# Altium PCB SIXXY_00.PcbDoc
Units mm, origin at the board's own origin, x right, y up, seen from the top; angles counter-clockwise.
Board outline 18.7 x 12.4 mm, 2 copper layers (Top Layer, Bottom Layer), stack 0.571 mm thick; 29 components, 24 nets, 113 pads, 15 vias.
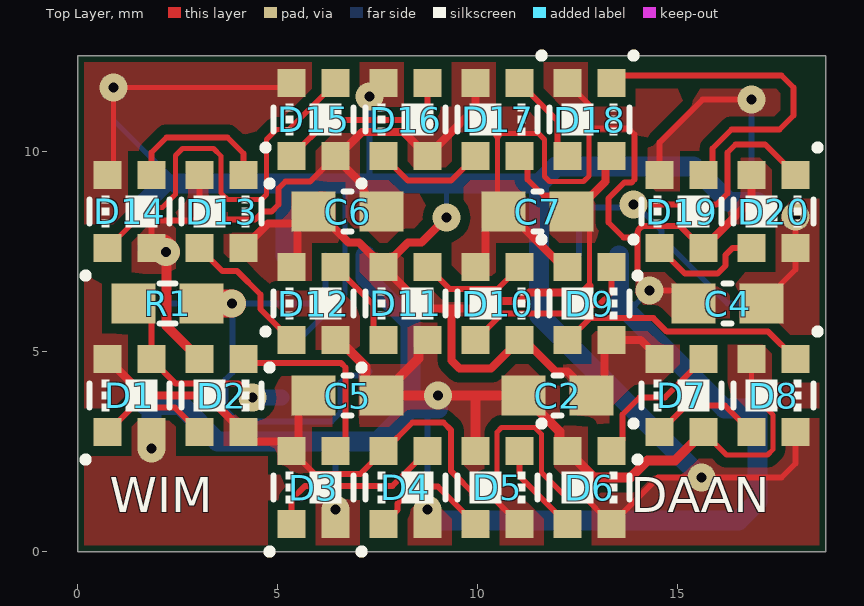
[diagram p0: Top Layer view]
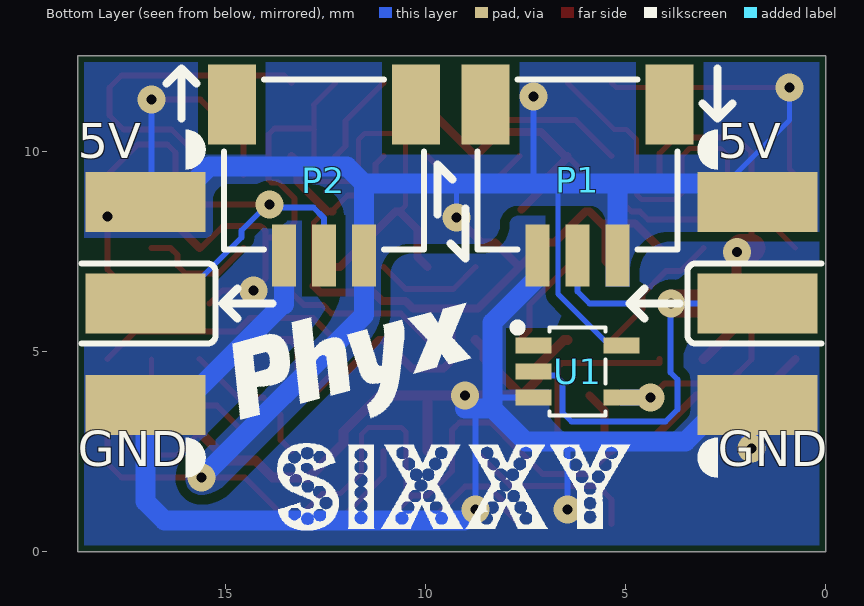
[diagram p1: Bottom Layer view, seen from below]
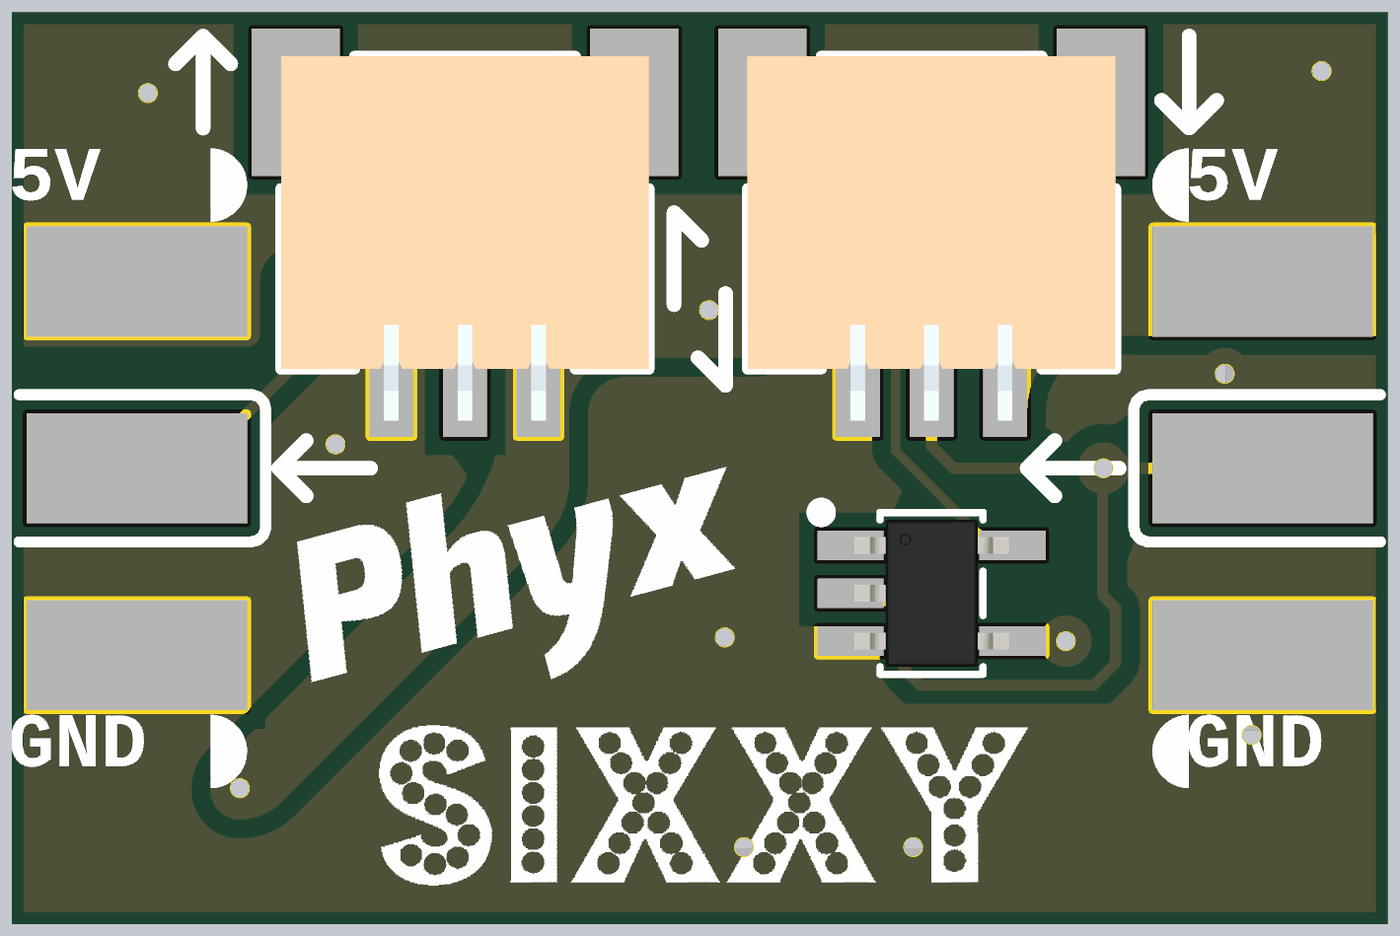
[diagram p2: 3D render of the assembled board from below, using the file's embedded part models]

## Layer stack, top to bottom
Top Solder: solder mask 0.0102, Solder Resist, Dk 3.5
Top Layer: signal copper 0.0356
Dielectric1: dielectric 0.5, FR-4, Dk 4.8
Bottom Layer: signal copper 0.0356
Bottom Solder: solder mask 0.0102, Solder Resist, Dk 3.5

## Board outline
0,0 0,12.4 18.7,12.4 18.7,0

## Design rules (kind name [scope] priority, off if disabled: settings)
BoardOutlineClearance [(OnLayer('Top Layer') OR OnLayer('Bottom Layer')) AND NOT IsText] p1: gap=0.15 ignorepadtopadclearanceinfootprint=FALSE except(0: Arc-SplitContinuation Track-SplitContinuation SMDPad-SplitContinuation THPad-SplitContinuation Via-SplitContinuation Fill-SplitContinuation Poly-SplitContinuation Region-SplitContinuation Text-SplitContinuation)
Clearance 230 [InNetClass('230VAC')] p1: gap=2 ignorepadtopadclearanceinfootprint=FALSE except(0: Arc-Hole Track-Hole SMDPad-Hole THPad-Hole Via-Hole Fill-Hole Poly-Hole Region-Hole Text-Hole)
Clearance [NOT (OnLayer('Placebound Top') OR OnLayer('Placebound Bottom'))] p2: gap=0.127 ignorepadtopadclearanceinfootprint=FALSE except(0: Arc-Hole Track-Hole SMDPad-Hole THPad-Hole Via-Hole Fill-Hole Poly-Hole Region-Hole Text-Hole; 0.25: Arc-Poly Track-Poly SMDPad-Poly THPad-Poly Via-Poly Fill-Poly Poly-Poly)
HoleSize [All] p1: absolutevalues=TRUE maxlimit=50 minlimit=0.025 maxpercent=80.000 minpercent=20.000
MinimumSolderMaskSliver [All] p1: minsoldermaskwidth=0.1
PolygonConnect PolygonConnect_Via [IsVia] p1: connectstyle=Direct reliefconductorwidth=0.254 reliefentries=4 polygonreliefangle="90 Angle" airgapwidth=0.254
PolygonConnect PolygonConnect_TIO [All vs OnLayer('Top Layer')] p2: connectstyle=Direct reliefconductorwidth=0.25 reliefentries=4 polygonreliefangle="90 Angle" airgapwidth=0.25
PolygonConnect [All] p3: connectstyle=Direct reliefconductorwidth=0.25 reliefentries=4 polygonreliefangle="90 Angle" airgapwidth=0.25
RoutingVias [All] p1: holewidth=0.3 width=0.7 viastyle="Through Hole" minholewidth=0.25 minwidth=0.7 maxholewidth=0.3 maxwidth=0.7
SilkToSolderMaskClearance SilkscreenOverComponentPads [IsPad] p1: minsilkscreentomaskgap=0.254 clearancetoexposedcopper=TRUE
SolderMaskExpansion SolderMaskExpansion_VIA [IsVia] p1: expansion=-0.1 useseparateexpansions=TRUE expansionbottom=-10
SolderMaskExpansion [All] p2: expansion=0.05
Width Width_230V [InNetClass('230VAC')] p1: maxlimit=5 minlimit=1 preferedwidth=2 minimp=50.000000 maximp=50.000000 favimp=50.000000
Width [All] p2: maxlimit=10 minlimit=0.127 preferedwidth=0.5 minimp=50.000000 maximp=50.000000 favimp=50.000000
27 further rules are at their usual default settings.

## Components (designator, comment, footprint, x,y, rotation, side; value= is the part's Value field where it differs from the comment)
C2 "CAP_CERAMIC" C0603_N 12,3.9 r180 top value="100nF 25V"
C4 "CAP_CERAMIC" C0603_N 16.25,6.2 r180 top value="100nF 25V"
C5 "CAP_CERAMIC" C0603_N 6.75,3.9 r0 top value="100nF 25V"
C6 "CAP_CERAMIC" C0603_N 6.75,8.5 r0 top value="100nF 25V"
C7 "CAP_CERAMIC" C0603_N 11.5,8.5 r180 top value="100nF 25V"
D1 "WS2812 based digital RGB LED 2022 package" LED_2022_WS2812B 1.3,3.9 r270 top value=WS2812B-2022
D2 "WS2812 based digital RGB LED 2022 package" LED_2022_WS2812B 3.6,3.9 r90 top value=WS2812B-2022
D3 "WS2812 based digital RGB LED 2022 package" LED_2022_WS2812B 5.9,1.6 r270 top value=WS2812B-2022
D4 "WS2812 based digital RGB LED 2022 package" LED_2022_WS2812B 8.2,1.6 r270 top value=WS2812B-2022
D5 "WS2812 based digital RGB LED 2022 package" LED_2022_WS2812B 10.5,1.6 r90 top value=WS2812B-2022
D6 "WS2812 based digital RGB LED 2022 package" LED_2022_WS2812B 12.8,1.6 r90 top value=WS2812B-2022
D7 "WS2812 based digital RGB LED 2022 package" LED_2022_WS2812B 15.1,3.9 r270 top value=WS2812B-2022
D8 "WS2812 based digital RGB LED 2022 package" LED_2022_WS2812B 17.4,3.9 r90 top value=WS2812B-2022
D9 "WS2812 based digital RGB LED 2022 package" LED_2022_WS2812B 12.8,6.2 r90 top value=WS2812B-2022
D10 "WS2812 based digital RGB LED 2022 package" LED_2022_WS2812B 10.5,6.2 r90 top value=WS2812B-2022
D11 "WS2812 based digital RGB LED 2022 package" LED_2022_WS2812B 8.2,6.2 r270 top value=WS2812B-2022
D12 "WS2812 based digital RGB LED 2022 package" LED_2022_WS2812B 5.9,6.2 r270 top value=WS2812B-2022
D13 "WS2812 based digital RGB LED 2022 package" LED_2022_WS2812B 3.6,8.5 r90 top value=WS2812B-2022
D14 "WS2812 based digital RGB LED 2022 package" LED_2022_WS2812B 1.3,8.5 r270 top value=WS2812B-2022
D15 "WS2812 based digital RGB LED 2022 package" LED_2022_WS2812B 5.9,10.8 r270 top value=WS2812B-2022
D16 "WS2812 based digital RGB LED 2022 package" LED_2022_WS2812B 8.2,10.8 r270 top value=WS2812B-2022
D17 "WS2812 based digital RGB LED 2022 package" LED_2022_WS2812B 10.5,10.8 r90 top value=WS2812B-2022
D18 "WS2812 based digital RGB LED 2022 package" LED_2022_WS2812B 12.8,10.8 r90 top value=WS2812B-2022
D19 "WS2812 based digital RGB LED 2022 package" LED_2022_WS2812B 15.1,8.5 r270 top value=WS2812B-2022
D20 "WS2812 based digital RGB LED 2022 package" LED_2022_WS2812B 17.4,8.5 r90 top value=WS2812B-2022
P1 "Header 1.0mm RA Shrouded 3" WE_665103131822 5.2,7.4 r0 bottom value=665103131822
P2 "Header 1.0mm RA Shrouded 3" WE_665103131822 11.541,7.4 r0 bottom value=665103131822
R1 "RESISTOR" R0603_N 2.25,6.2 r0 top value=0R
U1 "SN74LVC1G17DCKR  Buffer, Schmitt Trigger, 1.65V to 5.5V" TI_DCK_R-PDSO-G5 6.2,4.5 r270 bottom value=SN74LVC1G17DCKR

## Footprints (in the part's own frame and the unit in brackets; to place one, negate y for a bottom-side part, rotate by r counter-clockwise, add the part's x,y. Pads: shape width x height; smd on the part's side, far side on the other; paste and mask are expansions set on the pad)
C0603_N [mm] "Low density"
  rect 1.1x1 smd: 1(-0.85,0) 2(0.85,0)
  silkscreen extent -0.1,-0.5 0.1,0.5, body extent -0.8,-0.4 0.8,0.4, height 0.3
LED_2022_WS2812B [mm] "2022 WS2812B based RGB LED"
  rect 0.7x0.7 smd: 1(0.915,-0.55) 2(0.915,0.55) 3(-0.915,0.55) 4(-0.915,-0.55)
  silkscreen extent -0.4,-1.12 1.62,1, body extent -1.1,-1 1.1,1, height 0.84
R0603_N [mm] "Low density"
  rect 1.1x1 smd: 1(-0.85,0) 2(0.85,0)
  silkscreen extent -0.2,-0.5 0.2,0.5, body extent -0.8,-0.41 0.8,0.41, height 0.45
TI_DCK_R-PDSO-G5 [mm] "TI-DCK-R-PDSO-G5"
  rect 0.4x0.9 smd: 1(-0.65,-1.1) 2(0,-1.1) 3(0.65,-1.1) 4(0.65,1.1) 5(-0.65,1.1)
  silkscreen extent -1.2,-1.6 1.1,0.7, body extent -1,-1.05 1,1.05, height 0.95
WE_665103131822 [mm]
  rect 0.6x1.55 smd: 1(0,0) 2(1,0) 3(2,0)
  rect 1.2x2 smd: Z1(-1.3,-3.775) Z2(3.3,-3.775)
  silkscreen extent -1.5,-4.4 3.5,-0.15, body extent -1.5,-4.4 3.5,0.55, height 2.95

## Part data
C2 C4 C5 C6 C7: library part "CAP # 100nF 25V 0603", "Capacitor Ceramic", Supplier Part Number 1=1759037, Supplier 1=Farnell
D1 D2 D3 D4 D5 D6 D7 D8 D9 D10 D11 D12 D13 D14 D15 D16 D17 D18 D19 D20: library part "LED # RGB WS2812B-2022", "=Description", Supplier Part Number 1="WS2812B 2020 2022", Supplier 1=Aliexpress
P1 P2: library part "HDR # RA SHR 1.0mm 3way - 665103131822", Supplier Part Number 1=665103131822, Supplier 1=Wurth
R1: library part "RES # 0R 0603", Supplier Part Number 1=2447743, Supplier 1=Farnell
U1: library part "BUF # 1 SN74LVC1G17DCKR", "=Description", Supplier Part Number 1=1287609, Supplier 1=Farnell

## Free pads (board coordinates)
  rect 3x1.5 smd far side: S5(1.7,3.66) S5(1.7,6.2) S5(1.7,8.74) S5(17,3.66) S5(17,6.2) S5(17,8.74)

## Via types
v1: diameter 0.7, hole 0.25, Top Layer to Bottom Layer, tented top, 15 vias

## Nets (pads, with @x,y where several pads share a name; then routed paths per layer and width w, separated by ;. In a path a pad name is that pad's centre, name@x,y a point inside that pad or via, vN(x,y) a via of type N, cw(c..) or ccw(c..) an arc to the next point about the centre after c; other vN are vias at no path point)
5V: C2.1 C4.1 C5.1 C6.1 C7.1 D1.4 D2.4 D3.4 D4.4 D5.4 D6.4 D7.4 D8.4 D9.4 D10.4 D11.4 D12.4 D13.4 D14.4 D15.4 D16.4 D17.4 D18.4 D19.4 D20.4 P1.1 P2.1 pad.S5@1.7,8.74 pad.S5@17,8.74 U1.5 | length 109
  Top Layer w0.127: D14.4 0.9,9.565 v1(0.9,11.6) 5.235,11.6 D15.4 ; 10.335,1.4 10.491,1.556 10.491,2.991 10.6,3.1 11.434,3.1 11.6,2.934 11.6,1.975 12.125,1.45 12.585,1.45 D6.4 ; C7.1 12.45,8.5 12.519,8.5 12.8,8.219 12.8,6.644
  Top Layer w0.15: D3.4 5.925,1.94 7.075,1.94 D4.4 7.665,2.515 8.375,3.225 9.15,3.225 9.34,3.035 9.34,2.01 9.95,1.4 10.335,1.4 D5.4 ; D17.4 11.25,9.685 11.25,9.3 11.65,8.9 11.95,8.9 C7.1 ; D6.4 14.515,1.85 v1(15.6,1.85) 17.6,1.85 17.95,2.2 D8.4 ; D19.4 14.55,10.221 15.629,11.3 v1(16.85,11.3) ; C4.1 17.95,7.05 D20.4 v1(17.95,8.375) v1@17.95,8.4
  Top Layer w0.2: D1.4 1.663,3.902 3.233,3.902 D2.4 4.385,2.75 5.115,2.75 D3.4 5.525,2.69 5.525,3.525 C5.1 ; D13.4 4.765,8.2 C6.1@5.6,8.2 ; D12.4 5.5,7.265 5.5,8.1 C6.1@5.6,8.2 ; v1(9.225,8.35) 8.6,7.725 8.26,7.725 D11.4 ; C7.1@12.325,8.5 C7.1 ; C7.1@12.45,8.5 13.2,9.25 13.2,9.735 D18.4 ; 12.8,6.644 12.631,6.475 11.3,6.475 11.086,6.261 10.499,6.261 10.313,6.075 9.35,6.075 ; D7.4 14.08,5.285 D9.4 13.175,5.11 13.175,4.225 C2.1 12.25,4.5 11.954,4.5 11.169,5.285 D10.4 10.34,4.575 9.55,4.575 9.35,4.775 9.35,6.075 ; C6.1@5.6,8.2 C6.1 6,8.5 6.775,7.725 7.04,7.725 D11.4 ; D11.4 8.69,6.075 9.35,6.075
  Bottom Layer w0.127: v1(0.9,11.6) 0.9,10.785 2.485,9.2 pad.S5@2.16,9.2 ; U1.5 5.4,5.15 6.69,6.44 6.69,9.19 6.7,9.2 ; v1(9.225,8.35) 9.225,9.175
  Bottom Layer w0.15: 7.3,9.2 v1(7.3,11.375) ; v1(16.85,11.3) 16.85,8.89 pad.S5@17,8.74
  Bottom Layer w0.5: pad.S5@1.7,8.74 pad.S5@2.16,9.2 ; pad.S5@2.485,9.2 5.2,9.2 ; P1.1 5.2,9.2 ; v1(15.6,1.85) 11.541,5.909 P2.1 11.541,9.2 ; pad.S5@17,8.74 16.285,8.74 15.4,9.625 11.966,9.625 11.541,9.2 ; 5.2,9.2 6.7,9.2 7.3,9.2 11.541,9.2
GND: C2.2 C4.2 C5.2 C6.2 C7.2 D1.2 D2.2 D3.2 D4.2 D5.2 D6.2 D7.2 D8.2 D9.2 D10.2 D11.2 D12.2 D13.2 D14.2 D15.2 D16.2 D17.2 D18.2 D19.2 D20.2 P1.3 P2.3 pad.S5@1.7,3.66 pad.S5@17,3.66 U1.3 | length 97.9
  Top Layer w0.127: 10.498,10.398 10.498,8.652 C7.2 ; 10.498,10.45 11.525,10.45 11.675,10.3 11.675,9.375 11.8,9.25 12.65,9.25 12.791,9.391 12.791,10.55 12.791,11.156 12.8,11.165 D18.2 ; D7.2 16.222,2.412 17.247,2.412 17.391,2.556 17.391,3.414 16.85,3.954 D8.2
  Top Layer w0.15: v1(1.85,2.575) D1.2 ; D14.2 1.85,8.1 2.025,8.275 3.05,8.275 3.05,8.3 ; D13.2 3.05,8.3 ; D15.2 5.815,9.25 5.2,9.25 5.025,9.075 5.025,8.675 4.852,8.502 4.64,8.502 4.438,8.3 3.05,8.3 ; 12.791,10.55 12.816,10.575 13.775,10.575 13.925,10.425 13.925,9.3 13.852,9.227 13.671,9.227 13.275,8.831 13.275,8.225 13.65,7.85 13.998,7.85 ; C4.2 15.075,6.525 v1(14.3,6.525) 13.998,6.827 13.998,7.85 ; D19.2 15.615,7.585 15.063,8.137 14.185,8.137 ccw(c14.185,7.95) 13.998,7.95 13.998,7.85
  Top Layer w0.2: C6.2@7.6,8.55 7.15,9 7.15,9.15 6.45,9.85 D15.2 6.51,9.885 7.11,10.485 8.15,10.485 D16.2 9.95,11.085 ; D10.2 10.2,7.365 10.2,8.05 C7.2 10.75,8.5 12.135,7.115 D9.2 ; D17.2 9.95,11.085 ; 10.498,10.398 10.498,10.45 10.498,10.537 9.95,11.085 ; D19.2 16.85,8.785 D20.2
  Top Layer w0.25: v1@2.215,7.585 2.225,7.575 2.225,5.636 3.046,4.815 D2.2 ; D12.2 6.54,5.285 7.2,4.625 7.2,4.3 C5.2 ; D11.2 8.525,5.06 8.525,4.825 C5.2 ; D5.2 9.95,3.9 ; C2.2@11.15,3.9 9.95,3.9 ; C2.2 12.05,3 12.05,2.715 D6.2 12.915,1.85 13.825,1.85 14.25,2.275 14.94,2.275 D7.2 ; C5.2 v1(9.01,3.9) 9.95,3.9
  Top Layer w0.7: D14.2 2.115,7.585 v1(2.215,7.485)
  Bottom Layer w0.15: v1(6.45,1.05) 6.45,2.75 ; U1.3 8.325,3.85 ; v1(8.75,1.05) 8.75,3.579 8.75,3.61 ; 13.541,6.175 13.575,6.175 13.95,6.175 v1(14.3,6.525)
  Bottom Layer w0.5: pad.S5@1.7,3.66 2.59,3.66 3.5,2.75 6.45,2.75 7.5,2.75 8.325,3.575 ; v1(1.85,2.575) pad.S5@1.85,3.485 ; P1.3 7.2,6.85 8.325,5.725 8.325,3.85 8.325,3.575 ; v1(8.75,1.05) 9.025,0.775 16.525,0.775 17,1.25 pad.S5@17,3.575 ; v1@9.013,3.582 8.75,3.579 8.325,3.575 ; 13.541,6.175 P2.3 ; 13.575,6.175 16.175,3.575 pad.S5@17,3.575 ; pad.S5@17,3.66 pad.S5@17,3.575
LED.DATA.IN: P1.2 pad.S5@1.7,6.2 R1.2 U1.2 | length 13.7
  Top Layer w0.7: R1.2 v1(3.865,6.2)
  Bottom Layer w0.15: pad.S5@1.7,6.2 v1@3.875,6.2 ; P1.2 6.2,6.5 5.9,6.2 v1@3.875,6.2 ; U1.2 7.2,4.4 6.75,4.4 6.575,4.225 6.575,3.475 6.35,3.25 5.8,3.25 4,3.25 3.7,3.55 3.7,4.3 3.875,4.475 v1@3.875,6.2
LED.DATA.OUT: D20.1 P2.2 pad.S5@17,6.2 | length 12.1
  Top Layer w0.15: v1@13.85,8.65 13.875,8.675 v1(13.9,8.675) 15.975,8.675 16.25,8.95 16.25,9.975 16.45,10.175 17.19,10.175 D20.1
  Bottom Layer w0.15: P2.2 12.541,8.341 12.8,8.6 v1@13.85,8.6 ; v1@14.025,8.6 14.6,8.025 14.6,7.85 16.25,6.2 pad.S5@17,6.2
NetD1_1: D1.1 D2.3 | length 2.8
  Top Layer w0.15: D1.1 1.365,3.6 2.435,3.6 D2.3
NetD1_3: D1.3 R1.1 U1.4 | length 5.2
  Top Layer w0.15: R1.1 1.85,5.75 D1.3 1.85,4.8 2.446,4.204 4.021,4.204 v1(4.375,3.85)
  Bottom Layer w0.4: v1(4.375,3.85) U1.4
NetD2_1: D2.1 D3.3 | length 4.9
  Top Layer w0.15: D2.1 4.15,4.71 6.59,4.71 6.7,4.6 6.7,2.765 D3.3
NetD3_1: D3.1 D4.3 | length 4.5
  Top Layer w0.15: D3.1 5.35,1.3 5.69,1.64 7.875,1.64 D4.3
NetD4_1: D4.1 D5.3 | length 3.2
  Top Layer w0.15: D4.1 7.999,1.034 7.999,1.199 8.425,1.625 9.01,1.625 D5.3
NetD5_1: D5.1 D6.3 | length 2.3
  Top Layer w0.15: D5.1 11.05,1.885 D6.3
NetD6_1: D6.1 D7.3 | length 3.6
  Top Layer w0.15: D6.1 13.625,2.79 13.625,3.425 14.05,3.85 14.685,3.85 D7.3
NetD7_1: D7.1 D8.3 | length 2.9
  Top Layer w0.15: D7.1 15.215,3.65 16.185,3.65 D8.3
NetD8_1: D8.1 D9.3 | length 6.4
  Top Layer w0.15: D9.3 12.26,5.285 12.812,5.837 14.395,5.837 14.734,5.498 17.267,5.498 D8.1
NetD9_1: D9.1 D10.3 | length 4.5
  Top Layer w0.15: D10.3 10.615,5.95 12.35,5.95 12.565,6.165 13.04,6.165 13.35,6.475 D9.1
NetD10_1: D10.1 D11.3 | length 2.8
  Top Layer w0.15: D11.3 9.302,6.563 10.498,6.563 D10.1
NetD11_1: D11.1 D12.3 | length 2.3
  Top Layer w0.15: D12.3 7.4,6.165 7.4,5.535 D11.1
NetD12_1: D12.1 D13.3 | length 3.5
  Top Layer w0.15: D13.3 3.625,7.01 3.99,7.01 4.575,6.425 4.575,6.06 D12.1
NetD13_1: D13.1 D14.3 | length 3.7
  Top Layer w0.15: D14.3 1.85,9.975 2.225,10.35 3.75,10.35 4.15,9.95 D13.1
NetD14_1: D14.1 D15.3 | length 10.4
  Top Layer w0.127: D14.1 1.765,8.6 2.121,8.6 2.45,8.929 2.45,9.9 2.625,10.075 3.4,10.075 3.591,9.884 3.591,8.959 3.75,8.8 4.6,8.8 4.725,8.925 4.725,10.3 4.975,10.55 5.285,10.55 D15.3
NetD15_1: D15.1 D16.3 | length 4.5
  Top Layer w0.15: D15.1 6.252,10.787 8.462,10.787 8.75,11.075 D16.3
NetD16_1: D16.1 D17.3 | length 2.8
  Top Layer w0.15: D16.1 8.26,9.275 9.34,9.275 D17.3
NetD17_1: D17.1 D18.3 | length 2.3
  Top Layer w0.15: D17.1 12,10.765 12,10.135 D18.3
NetD18_1: D18.1 D19.3 | length 8.6
  Top Layer w0.15: D18.1 13.535,11.9 17.6,11.9 17.9,11.6 17.9,10.9 17.55,10.55 16.35,10.55 15.875,10.075 15.875,9.64 D19.3
NetD19_1: D19.1 D20.3 | length 3
  Top Layer w0.15: D19.1 15.185,6.95 16.001,6.95 16.202,7.151 16.202,7.417 16.37,7.585 D20.3
pads on no net: P1.Z1 P1.Z2 P2.Z1 P2.Z2 U1.1

## Polygon pours and split planes (outlines as drawn)
GND on Bottom Layer "GND_L02_P002" (solid, remove dead copper, pour order 2): 0,12.4 0,0 18.7,0 18.7,12.4
5V on Bottom Layer "5V_L02_P000" (solid, remove dead copper, pour order 0): 0,8 3.9,8 cw(c3.9,7) 4.9,7 4.9,6.625 5.5,6.625 5.5,8.25 cw(c5.9,8.25) 5.9,8.65 7.7,8.65 cw(c7.7,8.2) 8.15,8.2 8.15,8.175 ccw(c8.625,8.175) 8.625,7.7 10.375,7.7 cw(c10.375,6.95) 11.125,6.95 11.125,6.035 ccw(c12.235,6.035) 11.45,5.25 15.045,1.655 ccw(c15.6,2.21) 15.6,1.425 ccw(c15.6,1.825) 16,1.825 16,1.85 ccw(c15.517,1.85) 15.859,2.191 12.769,5.281 cw(c14.565,7.077) 12.025,7.077 12.025,8.315 cw(c12.9,8.315) 12.9,9.19 14.91,9.19 cw(c14.91,8.775) 15.325,8.775 15.325,8.025 ccw(c15.5,8.025) 15.5,7.85 18.7,7.85 18.7,12.4 0,12.4
GND on Top Layer "GND_L01_P004" (solid, remove dead copper, pour order 4): 0,12.4 0,0 18.7,0 18.7,12.4
5V on Top Layer "5V_L01_P006" (solid, remove dead copper, pour order 6): 0,12.4 0,0 18.7,0 18.7,12.4

## Keep-outs
Keep-Out Layer:
  text ".Layer_Name" at 298.5,-23 h3.5

## Other copper
Top Layer:
  text ".Layer_Name" at 298.5,-23 h3.5
Bottom Layer:
  text ".Layer_Name" at 298.5,-23 h3.5

## Silkscreen, mask and mechanical layers (free items; w line width, h text height)
Top Overlay:
  text "WIM" at 0.8,0.7 h1.5
  text "DAAN" at 13.832,0.7 h1.5
  text ".Layer_Name" at 298.5,-23 h3.5
Bottom Overlay:
  drawing of 44 lines, arcs and shapes, not listed
  text "5V" at 2.7,9.55 h1.5
  text "5V" at 18.7,9.55 h1.5
  text "GND" at 2.7,1.85 h1.5
  text "GND" at 18.7,1.85 h1.5
  text ".Layer_Name" at 298.5,-23 h3.5
Top Paste:
  text ".Layer_Name" at 298.5,-23 h3.5
Bottom Paste:
  text ".Layer_Name" at 298.5,-23 h3.5
Top Solder:
  text ".Layer_Name" at 298.5,-23 h3.5
Bottom Solder:
  text ".Layer_Name" at 298.5,-23 h3.5
Drill Guide:
  text ".Layer_Name" at 298.5,-23 h3.5
3D Symbols:
  text ".Layer_Name" at 298.5,-23 h3.5
Outline:
  the board outline again, w0.1
Comments:
  text ".Layer_Name" at 298.5,-23 h3.5
Fabrication:
  text "All Dimensions are in mm" at 0,-7.5 h1
  text "0.6mm thick PCB" at 0,-10 h1
  text ".Layer_Name" at 298.5,-23 h3.5
Placebound Top:
  text ".Layer_Name" at 298.5,-23 h3.5
Placebound Bottom:
  text ".Layer_Name" at 298.5,-23 h3.5
Frame:
  drawing of 15 lines, arcs and shapes, not listed
  text "Document" at 294,-8 h2
  text ".PCB_TITLE" at 295.5,-13.5 h4
  text "Layer Name" at 294,-18 h2
  text "Date" at 294,-28 h2
  text "Rev" at 334,-28 h2
  text ".Print_Date" at 297,-33.5 h3.5
  text ".PCB_REV" at 338.5,-33.5 h4
  text "Desginer" at 244,-38 h2
  text "Document" at 294,-38 h2
  text ".Pcb_File_Name_No_Path" at 295.5,-43 h1.5
  text ".PCB_ENGINEER" at 248.5,-43.5 h4
Assembly Top:
  text ".Layer_Name" at 298.5,-23 h0.5
Assembly Bottom:
  text ".Layer_Name" at 298.5,-23 h3.5
Drill Drawing:
  text ".legend" at 52.5,17.75 h1

## Dimensions
0,12.4 to 18.7,12.4 on Fabrication
18.7,12.4 to 18.7,0 on Fabrication